# Altium PCB PCB1_8.5.PcbDoc
Units mm, origin at the board's own origin, x right, y up, seen from the top; angles counter-clockwise.
Board outline 3.5 x 31.54 mm, 4 copper layers (Top Layer, fs, Layer 2, Bottom Layer), stack 0.603 mm thick; 8 components, 4 nets, 28 pads, 15 vias.
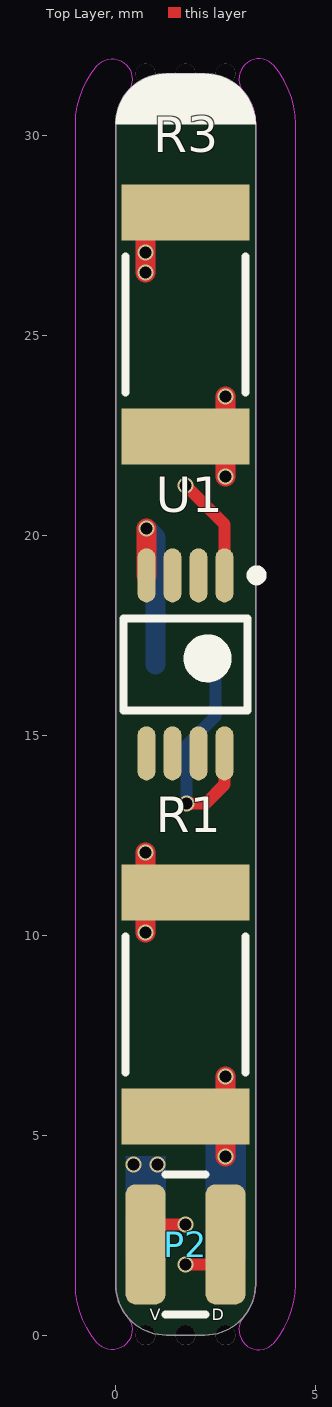
[diagram p0: Top Layer view]
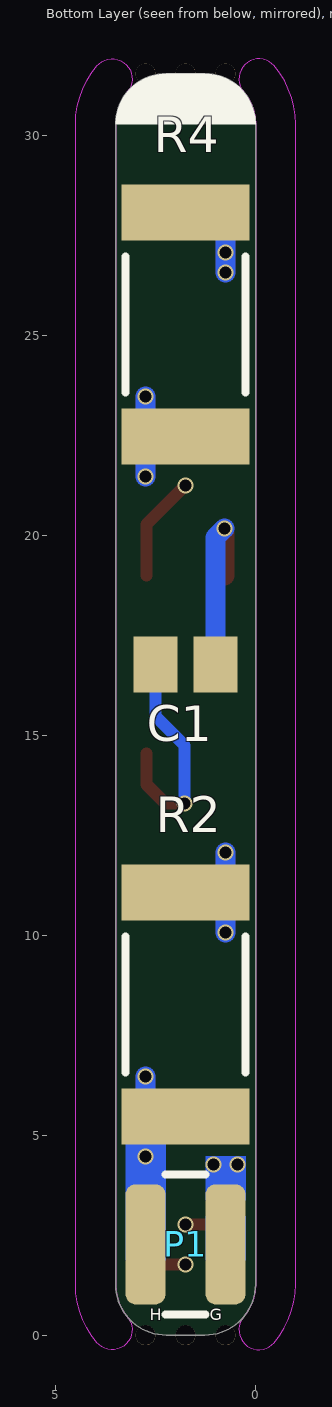
[diagram p1: Bottom Layer view, seen from below]
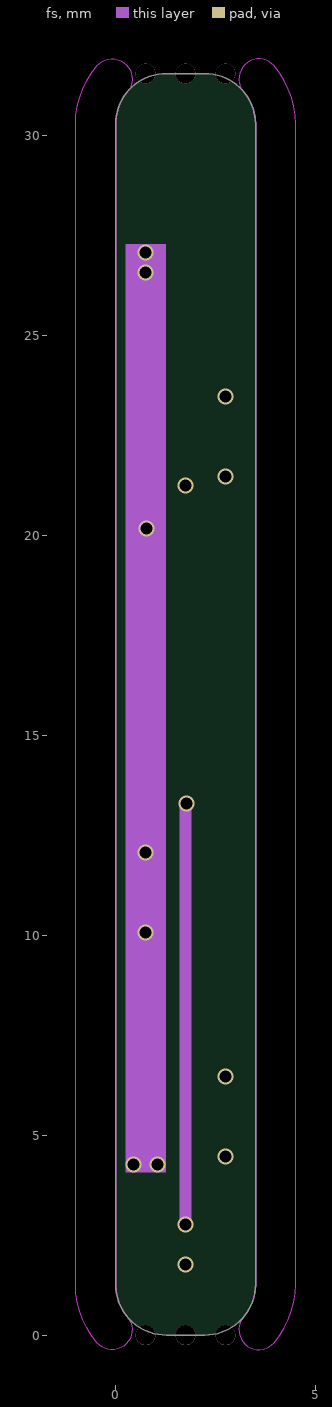
[diagram p2: fs]
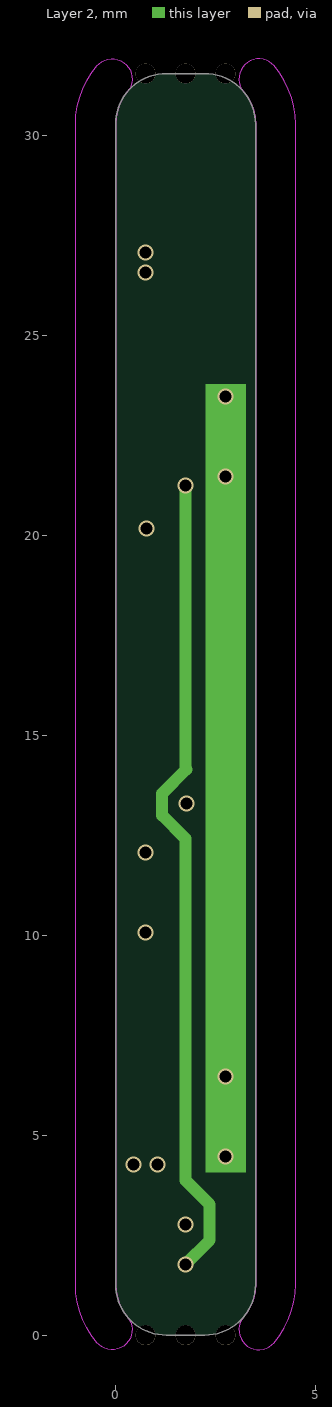
[diagram p3: Layer 2]
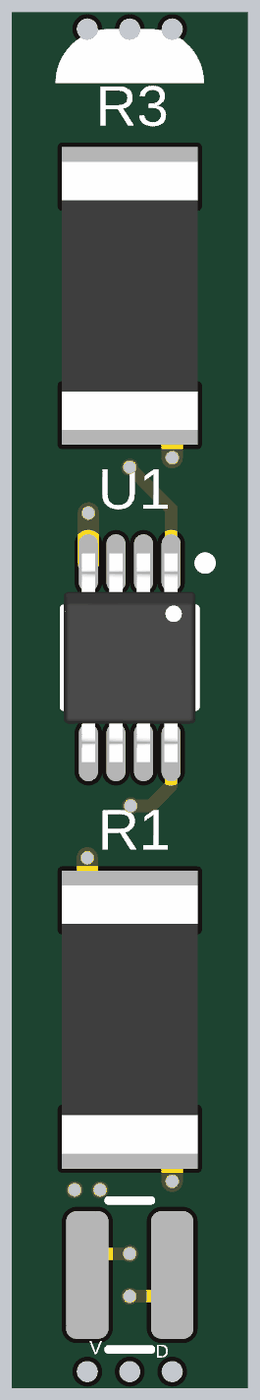
[diagram p4: 3D render of the assembled board from above, using the file's embedded part models]

## Layer stack, top to bottom
Top Solder: solder mask 0.0102, Solder Resist, Dk 3.5
Top Layer: signal copper 0.0356
Dielectric 2: prepreg 0.0711, PP-006, Dk 4.1
fs: signal copper 0.035
Dielectric 1: dielectric 0.32, FR-4, Dk 4.8
Layer 2: signal copper 0.035
Dielectric 3: prepreg 0.0711, PP-006, Dk 4.1
Bottom Layer: signal copper 0.0356
Bottom Solder: solder mask 0.0102, Solder Resist, Dk 3.5

## Board outline
0,1.27 0,30.27 cw(c1.27,30.27) 1.27,31.54 2.23,31.54 cw(c2.23,30.27) 3.5,30.27 3.5,1.27 cw(c2.23,1.27) 2.23,0 1.27,0 cw(c1.27,1.27)
cut-out: 0,30.265 ccw(c-0.5,30.269) 0,30.266 ccw(c-0.5,30.27) 0,30.27 cw(c1.27,30.27) 0,30.271 ccw(c-0.5,30.272) 0,30.273 ccw(c1.27,30.269) 0,30.272 cw(c-0.5,30.27) 0,30.27 ccw(c-0.5,30.272) 0,30.271 0,30.272 ccw(c1.27,30.269) 0,30.269 cw(c-0.5,30.269) 0,30.266 0,30.265 ccw(c-0.5,30.27) 0,30.268 0,30.27 ccw(c-0.5,30.27) 0,30.27 cw(c-0.5,30.272) 0,30.27 0,30.268 0,1.272 0,1.27 cw(c-0.5,1.27) 0,1.27 ccw(c1.27,1.274) 0.297,0.458 cw(c-0.086,0.136) -0.469,-0.185 cw(c1.27,1.274) -1,1.269 cw(c-0.5,1.27) -1,1.27 cw(c1.27,1.274) -1,1.272 cw(c1.27,1.274) -1,1.274 cw(c-0.5,1.274) -1,1.277 -1,30.267 cw(c-0.5,30.269) -1,30.269 cw(c1.27,30.269) -0.469,31.729 cw(c-0.086,31.407) 0.297,31.085 ccw(c1.27,30.269)
cut-out: 3.5,30.265 cw(c4,30.269) 3.5,30.266 cw(c4,30.27) 3.5,30.27 ccw(c2.23,30.27) 3.5,30.271 cw(c4,30.272) 3.5,30.273 cw(c2.23,30.269) 3.5,30.272 ccw(c4,30.27) 3.5,30.27 cw(c4,30.272) 3.5,30.271 3.5,30.272 cw(c2.23,30.269) 3.5,30.269 ccw(c4,30.269) 3.5,30.266 3.5,30.265 cw(c4,30.27) 3.5,30.268 3.5,30.27 cw(c4,30.27) 3.5,30.27 ccw(c4,30.272) 3.5,30.27 3.5,30.268 3.5,1.272 3.5,1.27 ccw(c4,1.27) 3.5,1.27 cw(c2.23,1.274) 3.203,0.458 ccw(c3.586,0.136) 3.969,-0.185 ccw(c2.23,1.274) 4.5,1.269 ccw(c4,1.27) 4.5,1.27 ccw(c2.23,1.274) 4.5,1.272 ccw(c2.23,1.274) 4.5,1.274 ccw(c4,1.274) 4.5,1.277 4.5,30.267 ccw(c4,30.269) 4.5,30.269 ccw(c2.23,30.269) 3.969,31.729 ccw(c3.586,31.407) 3.203,31.085 cw(c2.23,30.269)
cut-out: -1,1.268 cw(c-0.5,1.27) -1,1.27 ccw(c0,1.27) -1,1.266 cw(c-0.5,1.268) -1,1.268 cw(c1.27,1.27)

## Design rules (kind name [scope] priority, off if disabled: settings)
Clearance [All] p1: gap=0.254 ignorepadtopadclearanceinfootprint=FALSE except(0: Arc-Hole Track-Hole SMDPad-Hole THPad-Hole Via-Hole Fill-Hole Poly-Hole Region-Hole Text-Hole)
PolygonConnect [All] p1: connectstyle=Relief reliefconductorwidth=0.254 reliefentries=4 polygonreliefangle="90 Angle" airgapwidth=0.254
RoutingVias [All] p1: holewidth=0.711 width=1.27 viastyle="Through Hole" minholewidth=0.711 minwidth=1.27 maxholewidth=0.711 maxwidth=1.27
SolderMaskExpansion [All] p1: expansion=0.102 istentingtop=FALSE
Width [All] p1: maxlimit=0.5 minlimit=0.254 preferedwidth=0.254
30 further rules are at their usual default settings.

## Components (designator, comment, footprint, x,y, rotation, side; value= is the part's Value field where it differs from the comment)
C1 "1u" C0805 1.75,16.77 r0 bottom
P1 "Header 2" HDR1X2-SMT 1.75,2.27 r0 bottom
P2 "Header 2" HDR1X2-SMT 1.75,2.27 r0 top
R1 "50" RES-2512-6332 1.75,8.27 r90 top
R2 "50" RES-2512-6332 1.75,8.27 r90 bottom
R3 "50" RES-2512-6332 1.75,25.27 r90 top
R4 "50" RES-2512-6332 1.75,25.27 r90 bottom
U1 "DS18B20U" MSSOP-8 1.75,16.77 r270 top

## Footprints (in the part's own frame and the unit in brackets; to place one, negate y for a bottom-side part, rotate by r counter-clockwise, add the part's x,y. Pads: shape width x height; smd on the part's side, far side on the other; paste and mask are expansions set on the pad)
C0805 [mm] "Chip Capacitor, Body 2.0x1.3mm, IPC High Density"
  rect 1.1x1.4 smd: 1(-0.75,0) 2(0.75,0)
  body extent -1.1,-0.72 1.1,0.72, height 1.4
HDR1X2-SMT [mm] "Connector; Header; 2 Position"
  rrect50% 1x3 smd: 1(-1,0) 2(1,0)
  silkscreen extent -0.5,-1.75 0.5,1.75
MSSOP-8 [mm] "TSOP, 8-Leads, Body 3.00x3.00mm, Pitch 0.65mm, IPC Medium Density"
  oval 1.35x0.45 smd: 1(-2.225,0.975) 2(-2.225,0.325) 3(-2.225,-0.325) 4(-2.225,-0.975) 5(2.225,-0.975) 6(2.225,-0.325) 7(2.225,0.325) 8(2.225,0.975)
  silkscreen extent -2.35,-1.55 1.15,1.9, body extent -2.45,-1.55 2.45,1.55, height 1.1
RES-2512-6332 [mm]
  rect 1.4x3.2 smd: 1(-2.8,0) 2(2.8,0)
  silkscreen extent -1.7,-1.5 1.7,1.5, body extent -3.15,-1.6 3.15,1.6, height 0.6

## Part data
C1: library part Cap, "Capacitor", Link=https://au.mouser.com/ProductDetail/Vishay-Vitramon/VJ1206Y105MXJTW1BC?qs=sGAEpiMZZMs0AnBnWHyRQHefeAIkSpb%2FMIV0RdtEp0g%3D
P1 P2: "Header, 2-Pin", LatestRevisionDate=17-Jul-2002, LatestRevisionNote="Re-released for DXP Platform.", Publisher="Altium Limited"
R1 R2 R3 R4: library part Res3, "Resistor", Link=https://au.mouser.com/ProductDetail/Bourns/CRM2010-FX-51R0ELF?qs=%2FxfeZyN5VBcgDrGLY%2FOOpg%3D%3D
U1: Link=https://au.mouser.com/ProductDetail/Maxim-Integrated/DS18B20U%2bTR?qs=sGAEpiMZZMvbyeSUH4qH%2FCjwslw0Uk0S

## Free pads (board coordinates)
  round 0.5 hole 0.5 unplated: 65(0.75,0) 66(1.75,0) 67(2.75,0) 68(0.75,31.54) 69(1.75,31.54) 70(2.75,31.54)

## Via types
v1: diameter 0.4, hole 0.3, Top Layer to Bottom Layer, tented both sides, 15 vias

## Nets (pads, with @x,y where several pads share a name; then routed paths per layer and width w, separated by ;. In a path a pad name is that pad's centre, name@x,y a point inside that pad or via, vN(x,y) a via of type N, cw(c..) or ccw(c..) an arc to the next point about the centre after c; other vN are vias at no path point)
Data: P2.2 U1.1 | length 23.9
  Top Layer w0.3: v1(1.75,1.77) P2.2@2.55,1.77 ; v1(1.75,21.245) 2.725,20.27 U1.1
  Layer 2 w0.3: v1(1.75,1.77) 2.354,2.374 2.354,3.266 1.75,3.87 1.75,12.412 1.167,12.995 1.167,13.541 1.771,14.145 1.75,14.166 v1(1.75,21.245)
GND: C1.1 P1.1 R1.2 R2.2 R3.2 R4.2 U1.4 | length 10
  Top Layer w0.5: v1(0.75,10.07) R1.2@0.75,10.62 ; R1.2@0.75,11.52 v1(0.75,12.07) ; v1(0.75,26.57) v1(0.75,27.07) R3.2@0.75,27.62 ; U1.4 v1(0.775,20.17)
  Bottom Layer w0.5: v1(0.75,10.07) R2.2@0.75,10.97 ; R2.2@0.75,11.17 v1(0.75,12.07) ; v1(0.75,26.57) v1(0.75,27.07) R4.2@0.75,27.97 ; v1(0.775,20.17) 1,19.945 C1.1
  other v1: 0.45,4.27 1.05,4.27
Heat: P1.2 R1.1 R2.1 R3.1 R4.1 | length 5.8
  Top Layer w0.5: v1(2.75,4.47) R1.1@2.75,5.02 ; R1.1@2.75,5.92 v1(2.75,6.47) ; v1(2.75,21.47) R3.1@2.75,22.02 ; R3.1@2.75,22.92 v1(2.75,23.47)
  Bottom Layer w0.5: v1(2.75,4.47) R2.1@2.75,5.37 ; R2.1@2.75,5.57 v1(2.75,6.47) ; v1(2.75,21.47) R4.1@2.75,22.37 ; R4.1@2.75,22.57 v1(2.75,23.47)
Vdd: C1.2 P2.1 U1.8 | length 17
  Top Layer w0.3: P2.1@0.95,2.77 v1(1.75,2.77) ; v1(1.771,13.291) 2.251,13.291 2.725,13.765 U1.8
  fs w0.3: v1(1.75,2.77) v1@1.75,13.291
  Bottom Layer w0.3: v1(1.771,13.291) 1.771,14.741 2.5,15.47 C1.2
pads on no net: U1.2 U1.3 U1.5 U1.6 U1.7

## Other copper
fs:
  region net GND: 1.25,4.07 0.25,4.07 0.25,27.27 1.25,27.27
Layer 2:
  region net Heat: 3.25,4.07 2.25,4.07 2.25,23.77 3.25,23.77
Bottom Layer:
  region net GND: 0.25,3.37 1.25,3.37 1.25,4.47 0.25,4.47
  region net Heat: 2.25,3.37 3.25,3.37 3.25,5.02 2.25,5.02
  region net Heat: 2.25,1.87 3.25,1.87 3.25,3.52 2.25,3.52
  region net GND: 0.25,1.87 1.25,1.87 1.25,2.97 0.25,2.97

## Silkscreen, mask and mechanical layers (free items; w line width, h text height)
Top Overlay:
  region: 0,30.27 cw(c1.27,30.27) 1.27,31.54 2.23,31.54 cw(c2.23,30.27) 3.5,30.27
  text "V" at 0.85,0.27 h0.5
  text "D" at 2.4,0.27 h0.5
Bottom Overlay:
  region: 0,30.27 cw(c1.27,30.27) 1.27,31.54 2.23,31.54 cw(c2.23,30.27) 3.5,30.27
  text "G" at 1.146,0.27 h0.5
  text "H" at 2.65,0.27 h0.5
Mechanical 1:
  the board outline again, w0.254
Mechanical 15:
  lines w1: -0.5,1.273 ccw(c1.27,1.273) -0.086,0.135 ; -0.5,30.267 cw(c1.27,30.267) -0.086,31.405 ; 3.586,0.136 ccw(c2.23,1.274) 4,1.274 ; 3.586,31.407 cw(c2.23,30.269) 4,30.269 ; -0.5,1.27 ccw(c1.27,1.27) -0.5,1.268 cw(c0,1.27) -0.5,1.27 ; -0.5,1.27 -0.5,30.27 ; -0.5,30.27 -0.5,30.27 ; 4,1.27 ccw(c3.5,1.27) 4,1.272 ; 4,1.27 ccw(c3.5,1.27) 4,1.272 ; 4,1.27 4,1.272 ; 4,1.272 4,30.27 ; 4,30.27 ccw(c3.5,30.27) 4,30.272 ; 4,30.27 ccw(c3.5,30.27) 4,30.272 ; 4,30.27 ccw(c2.23,30.27) 4,30.272
Drill Drawing:
  lines w0.254: 0,30.27 cw(c1.27,30.27) 1.27,31.54 ; 0,30.27 cw(c1.27,30.27) 1.27,31.54 ; 0,30.27 0,1.27 ccw(c1.27,1.27) 1.27,0 ; 1.27,0 2.23,0 ; 1.27,0 2.23,0 ; 1.27,31.54 2.23,31.54 ; 1.27,31.54 2.23,31.54 ; 2.23,0 ccw(c2.23,1.27) 3.5,1.27 3.5,30.27 ; 2.23,31.54 cw(c2.23,30.27) 3.5,30.27 ; 2.23,31.54 cw(c2.23,30.27) 3.5,30.27